# EAGLE board breakout_mdbt40 (EAGLE 7.2.0)
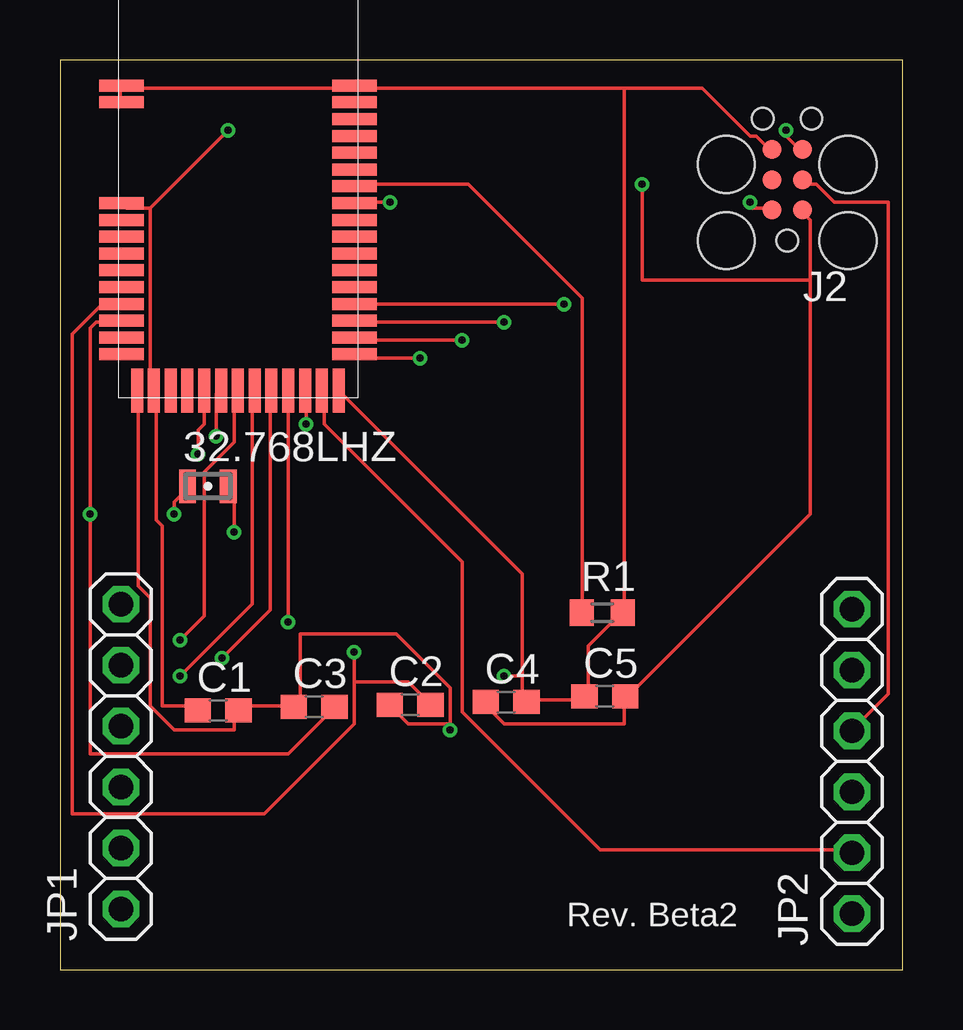
[diagram p0: board, top side]
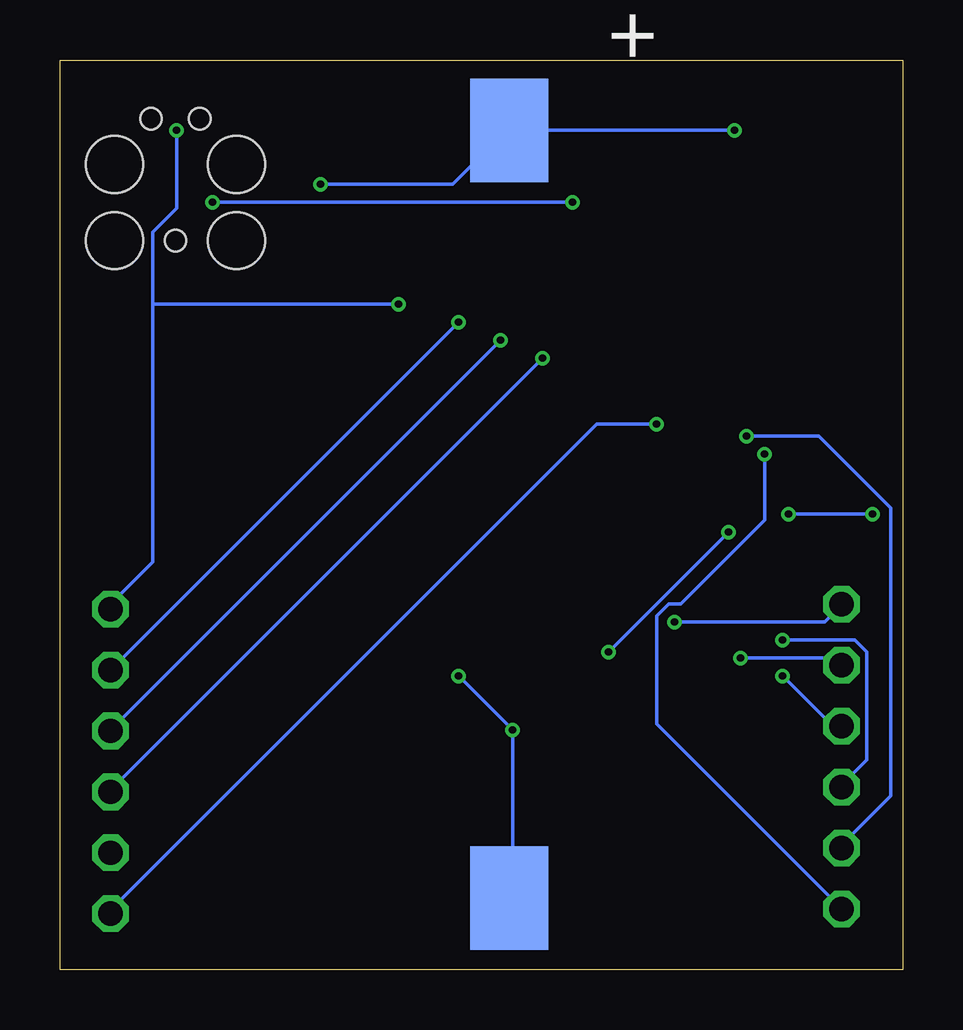
[diagram p1: board, bottom side, seen from below]

Size 35.11 x 37.93 mm. Coordinates in mm from the lower left corner, seen from the top.
Outline: 0,0 35.11,0 35.11,37.93 0,37.93 0,0
Copper layers (1*16): Top 0.035mm / dielectric 1.5mm / Bottom 0.035mm
Design rules "SeeedStudio_2layer_DRU_no_angle_20140221": minimum track width 6mil, minimum drill 12mil, track to track 6mil, track to pad 6mil, pad to pad 6mil, via to via 6mil, smd to smd 0mil, copper to edge 10mil, drill to drill 10mil, minimum pad ring 10mil, minimum via ring 6mil, stop-mask expansion 2mil, vias tented up to drill 100mil, thermal gap 10mil

## Footprints (pad centres in the part's own frame; a part is rotated, then mirrored left to right if it is on the bottom)
FC-12M = smd 0.7 x 1.4: 1 -0.85,0; 2 0.85,0
C0603 = smd 1.1 x 1: 1 -0.85,0; 2 0.85,0
TC2030-MCP = smd 0.787 x 0.787: 1 1.27,-0.635; 2 1.27,0.635; 3 2.54,-0.635; 4 2.54,0.635; 5 3.81,-0.635; 6 3.81,0.635 | hole 0.889: 0,0; 5.08,-1.016; 5.08,1.016 | hole 2.375: 0,2.54; 0,-2.54; 3.175,-2.54; 3.175,2.54
1X06 = drill 1.016 octagon: 1 -6.35,0; 2 -3.81,0; 3 -1.27,0; 4 1.27,0; 5 3.81,0; 6 6.35,0
R0603 = smd 1 x 1.1: 1 -0.85,0; 2 0.85,0
RAYTAC-MDBT40 = smd 1.85 x 0.5: 1 -4.86,4; 2 -4.86,3.3; 3 -4.86,-0.9; 4 -4.86,-1.6; 5 -4.86,-2.3; 6 -4.86,-3; 7 -4.86,-3.7; 8 -4.86,-4.4; 9 -4.86,-5.1; 10 -4.86,-5.8; 11 -4.86,-6.5; 12 -4.86,-7.2; 26 4.84,-7.2; 27 4.84,-6.5; 28 4.84,-5.8; 29 4.84,-5.1; 30 4.84,-4.4; 31 4.84,-3.7; 32 4.84,-3; 33 4.84,-2.3; 34 4.84,-1.6; 35 4.84,-0.9; 36 4.84,-0.2; 37 4.84,0.5; 38 4.84,1.2; 39 4.84,1.9; 40 4.84,2.6; 41 4.84,3.3; 42 4.84,4 | smd 0.5 x 1.85: 13 -4.22,-8.71; 14 -3.52,-8.71; 15 -2.82,-8.71; 16 -2.12,-8.71; 17 -1.42,-8.71; 18 -0.72,-8.71; 19 -0.02,-8.71; 20 0.68,-8.71; 21 1.38,-8.71; 22 2.08,-8.71; 23 2.78,-8.71; 24 3.48,-8.71; 25 4.18,-8.71
SMTU2450-BOTTOM-MINI = smd 3.251 x 4.318 bottom: P$_GND 0,-16; P$_VCC 0,16

## Placement (x,y rotation side)
32.768LHZ  FC-12M  [FC-12M]  6.16,20.16 0 top
C1  0.1uf  [C0603]  6.59,10.81 0 top
C2  12pf  [C0603]  14.59,11.05 0 top
C3  12pf  [C0603]  10.59,10.97 0 top
C4  0.1uf  [C0603]  18.59,11.16 0 top
C5  0.1uf  [C0603]  22.7,11.4 0 top
J2  [TC2030-MCP]  30.3,30.4 90 top
JP1  [1X06]  2.54,8.89 90 top
JP2  [1X06]  33,8.69 90 top
R1  [R0603]  22.59,14.89 0 top
U$1  RAYTAC-MDBT40  [RAYTAC-MDBT40]  7.43,32.86 0 top
U$3  SMTU2450-BOTTOM-MINI  [SMTU2450-BOTTOM-MINI]  16.4,19 0 top

## Library data of the parts
32.768LHZ = crystal
C1-C5 JP1 JP2 R1 = adafruit
J2 = tag-connect
U$1 = gclueBT
U$3 = gclue

## Nets
+3V3: C1.1 C4.1 C5.2 J2.1 U$1.3 U$1.14 U$3.P$_VCC
GND: C1.2 C2.1 C3.1 C4.2 C5.1 J2.6 R1.2 U$1.1 U$1.2 U$1.13 U$1.25 U$1.42 U$3.P$_GND
N$7: 32.768LHZ.2 C2.2 U$1.9
N$8: 32.768LHZ.1 C3.2 U$1.10
N$21: U$1.37
N$22: U$1.38
N$23: U$1.39
N$24: U$1.40
P0_00: JP1.1 U$1.17
P0_01: JP1.2 U$1.18
P0_02: JP1.3 U$1.19
P0_03: JP1.4 U$1.20
P0_04: JP1.5 U$1.21
P0_05: JP1.6 U$1.22
P0_06: JP2.1 U$1.23
P0_07: JP2.2 U$1.24
P0_08: JP2.3 U$1.26
P0_09: J2.3 JP2.4 U$1.27
P0_10: JP2.5 U$1.28
P0_11: J2.5 JP2.6 U$1.29
P0_12: U$1.30
P0_13: U$1.31
P0_14: U$1.32
P0_15: U$1.33
P0_16: U$1.34
P0_21: U$1.4
P0_22: U$1.5
P0_23: U$1.6
P0_24: U$1.7
P0_25: U$1.8
P0_28: U$1.11
P0_29: U$1.12
P0_30: U$1.16
SWCLK: R1.1 U$1.36
SWDCLK: J2.4
SWDIO: J2.2 U$1.35

## Tracks (layer width: path | path; a pad name or v marks a point on that pad's centre or on a via)
+3V3  (via drill 0.3)
  Top 0.152: 31.25,28.75 31.25,19 23.75,11.5 C5.2 23.5,11.25 23.5,10.25 18.5,10.25 17.75,11 C4.1 | 31.25,28.75 31.25,31.25 31,31.5 J2.1 | C1.1 5.5,11 4.25,11 4.25,18.5 4,18.75 4,24 U$1.14 3.75,24.25 3.75,31.75 | 3.75,31.75 2.75,31.75 U$1.3 | 3.75,31.75 v7,35 | 31.25,28.75 24.25,28.75 v24.25,32.75
  Bottom 0.152: v7,35 U$3.P$_VCC 16.5,35 18.75,32.75 v24.25,32.75
GND  (via drill 0.3)
  Top 0.152: 16.25,10.25 14.5,10.25 13.75,11 C2.1 | 16.25,10.25 16.25,11.75 14,14 10,14 10,11.25 9.75,11 C3.1 9.5,11 7.5,11 C1.2 7.25,10.75 7.25,10 4.75,10 3.75,11 3.75,15.5 3.25,16 3.25,24 U$1.13 | 16.25,10.25 v16.25,10 | 19.25,12.25 19.25,11.25 C4.2 19.5,11.25 21.75,11.25 C5.1 22,11.5 22,13.5 23.25,14.75 R1.2 23.5,15 23.5,36.75 | 19.25,12.25 19.25,16.5 11.75,24 U$1.25 | U$1.2 2.5,36.25 2.5,36.75 U$1.1 2.75,36.75 12.25,36.75 U$1.42 12.5,36.75 23.5,36.75 | 23.5,36.75 26.75,36.75 28.75,34.75 29,34.75 29.5,34.25 J2.6 | 19.25,12.25 v18.5,12.25
  Bottom 0.152: U$3.P$_GND 16.25,3 v16.25,10 v18.5,12.25
N$7  (via drill 0.3)
  Top 0.152: 12.25,12 14.5,12 15.25,11.25 C2.2 | 12.25,12 12.25,10.25 8.5,6.5 0.5,6.5 0.5,26.5 1.75,27.75 2.5,27.75 U$1.9 | v7.25,18.25 7.25,20 32.768LHZ.2 | 12.25,12 v12.25,13.25
  Bottom 0.152: v12.25,13.25 v7.25,18.25
N$8  (via drill 0.3)
  Top 0.152: C3.2 11.25,10.75 9.5,9 1.25,9 v1.25,19 1.25,26.75 1.5,27 2.5,27 U$1.10 | v4.75,19 4.75,19.5 5.25,20 32.768LHZ.1
  Bottom 0.152: v1.25,19 v4.75,19
P0_00  (via drill 0.3)
  Top 0.152: v5.75,21.5 5.75,22.5 6,22.75 6,24 U$1.17
  Bottom 0.152: v5.75,21.5 5.75,18.75 9.25,15.25 9.75,15.25 10.25,14.75 10.25,10.25 JP1.1
P0_01  (via drill 0.3)
  Top 0.152: v6.5,22.25 6.5,24 U$1.18
  Bottom 0.152: v6.5,22.25 3.5,22.25 0.5,19.25 0.5,7.25 2.5,5.25 JP1.2
P0_02  (via drill 0.3)
  Top 0.152: v5,13.75 6,14.75 6,20.75 7.25,22 7.25,24 U$1.19
  Bottom 0.152: v5,13.75 2,13.75 1.5,13.25 1.5,8.75 2.5,7.75 JP1.3
P0_03  (via drill 0.3)
  Top 0.152: v5,12.25 8,15.25 8,24 U$1.20
  Bottom 0.152: v5,12.25 2.75,10 JP1.4
P0_04  (via drill 0.3)
  Top 0.152: v6.75,13 8.75,15 8.75,24 U$1.21
  Bottom 0.152: v6.75,13 3,13 2.75,12.75 JP1.5
P0_05  (via drill 0.3)
  Top 0.152: v9.5,14.5 9.5,24 U$1.22
  Bottom 0.152: v9.5,14.5 3.25,14.5 2.75,15 JP1.6
P0_06  (via drill 0.3)
  Top 0.152: v10.25,22.75 10.25,24 U$1.23
  Bottom 0.152: v10.25,22.75 12.75,22.75 33,2.5 JP2.1
P0_07
  Top 0.152: U$1.24 11,24 11,22.75 16.75,17 16.75,10.75 22.5,5 33,5 JP2.2
P0_08  (via drill 0.3)
  Top 0.152: v15,25.5 12.5,25.5 U$1.26
  Bottom 0.152: v15,25.5 33,7.5 JP2.3
P0_09  (via drill 0.3)
  Top 0.152: J2.3 31,32.75 31.5,32.75 32.25,32 34.5,32 34.5,11.5 33,10 JP2.4 | v16.75,26.25 12.5,26.25 U$1.27
  Bottom 0.152: v16.75,26.25 33,10 JP2.4
P0_10  (via drill 0.3)
  Top 0.152: v18.5,27 12.5,27 U$1.28
  Bottom 0.152: JP2.5 v18.5,27
P0_11  (via drill 0.3)
  Top 0.152: v30.25,35 30.25,34.75 30.75,34.25 J2.5 | v21,27.75 12.5,27.75 U$1.29
  Bottom 0.152: v30.25,35 30.25,31.75 31.25,30.75 31.25,27.75 | 31.25,27.75 31.25,17 33,15.25 JP2.6 | 31.25,27.75 v21,27.75
SWCLK
  Top 0.152: R1.1 21.75,15 21.75,28 17,32.75 12.5,32.75 U$1.36
SWDIO  (via drill 0.3)
  Top 0.152: v28.75,32 28.75,31.75 29.5,31.75 J2.2 | v13.75,32 12.5,32 U$1.35
  Bottom 0.152: v13.75,32 v28.75,32

## Text on the board
tPlace: Rev. Beta2